# Altium PCB SystemV1.PcbDoc (part 3 of 3)
Units mm, origin at the board's own origin, x right, y up, seen from the top; angles counter-clockwise.
Board outline 488.95 x 74.14 mm, 4 copper layers (Top Layer, GND, VCC, Bottom Layer), stack 1.586 mm thick; 264 components, 188 nets, 862 pads, 658 vias.
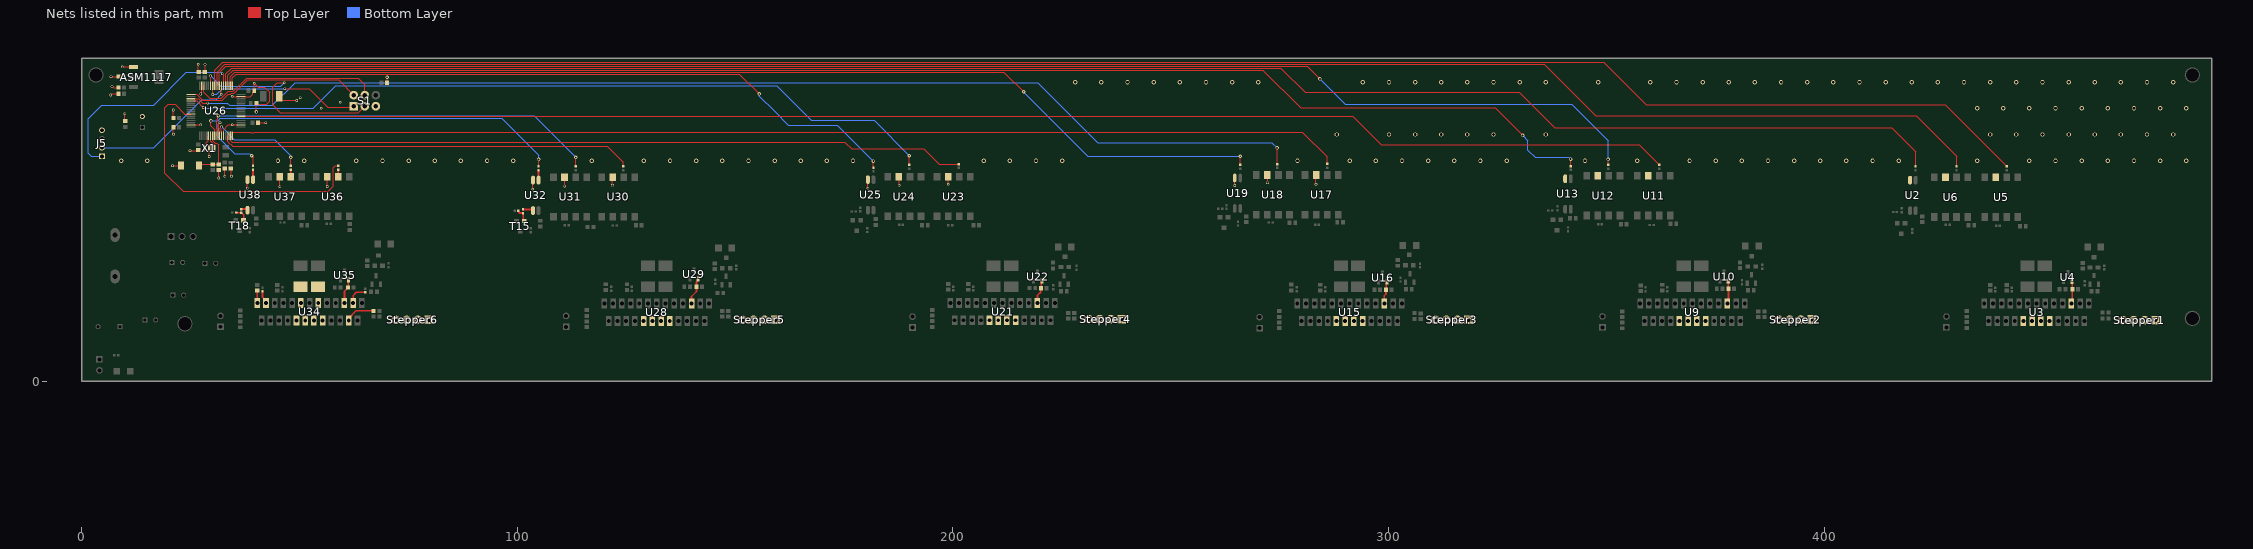
[diagram p5: the nets of this part, all layers, seen from the top]

## Via types
v1: diameter 1, hole 0.6, Top Layer to Bottom Layer, tented both sides, 342 vias
v2: diameter 0.8, hole 0.4, Top Layer to Bottom Layer, tented both sides, 207 vias
v3: diameter 0.6, hole 0.4, Top Layer to Bottom Layer, tented both sides, 109 vias

## Nets (pads, with @x,y where several pads share a name; then routed paths per layer and width w, separated by ;. In a path a pad name is that pad's centre, name@x,y a point inside that pad or via, vN(x,y) a via of type N, cw(c..) or ccw(c..) an arc to the next point about the centre after c; other vN are vias at no path point) (continued)
NetR102_1: R102.1 U32.1 | length 2.3
  Top Layer w0.381: U32.1@104.902,46.172 R102.1@104.902,48.462
NetR103_1: R103.1 R104.1 T15.B | length 3.4
  Top Layer w0.381: R104.1@100.255,39.116 100.268,39.116 100.347,39.036 100.347,38.755 100.505,38.598 101.305,38.598 R103.1@101.346,38.556 101.426,38.477 101.426,36.945 T15.B@101.611,36.76
NetR103_2: R103.2 U32.3 | length 2.4
  Top Layer w0.381: R103.2@101.346,39.422 103.392,39.422 103.632,39.182 U32.3@103.632,39.172
NetR106_2: R106.2 U34.3 | length 4.8
  Top Layer w0.381: U34.3@62.345,17.97 62.337,17.978 62.337,19.69 63.043,20.396 R106.2@65.1,20.396
NetR111_1: R111.1 U34.25 | length 2.9
  Top Layer w0.381: U34.25@40.345,17.97 40.361,17.986 R111.1@40.361,20.824
NetR112_1: R112.1 U34.4 | length 6.9
  Top Layer w0.381: U34.4@61.345,13.97 61.345,14.478 63.011,16.144 R112.1@67.005,16.144
NetR114_1: R114.1 U34.23 | length 3
  Top Layer w0.381: R114.1@41.529,20.635 41.529,19.294 42.345,18.478 U34.23@42.345,17.97
NetR115_2: R115.2 U34.11
NetR116_2: R116.2 U34.15
NetR118_1: R118.1 U36.2 | length 1.6
  Top Layer w0.381: U36.2@58.928,46.938 R118.1@58.928,48.564
NetR120_1: R120.1 U37.2 | length 1.6
  Top Layer w0.381: U37.2@48.006,46.938 R120.1@48.006,48.564
NetR122_1: R122.1 U38.1 | length 2.3
  Top Layer w0.381: U38.1@39.37,46.274 R122.1@39.37,48.564
NetR123_1: R123.1 R124.1 T18.B | length 3.2
  Top Layer w0.381: R124.1@35.485,38.71 35.511,38.684 36.677,38.684 R123.1@36.703,38.658 36.703,38.645 37.211,38.137 T18.B@37.211,36.932
NetR123_2: R123.2 U38.3 | length 1.5
  Top Layer w0.381: R123.2@36.703,39.523 37.86,39.523 38.1,39.284 U38.3@38.1,39.274
OSC_IN: U26.5 X1.1 | length 2.5
  Top Layer w0.25: 28.123,54.234 29.111,55.222 U26.5@29.111,56.328
OSC_OU: U26.6 X1.3 | length 3.3
  Top Layer w0.25: U26.6@29.611,56.328 29.611,55.073 30.412,54.272 30.412,53.567 X1.3@30.537,53.442
RST: C32.2 R83.2 SW5.2 U26.7 | length 12
  Top Layer w0.25: SW5.2@26.967,49.505 27.236,49.774 R83.2@30.099,49.774 31.481,49.774 C32.2@31.496,49.759 31.496,54.254 31.081,54.67 30.655,54.67 30.121,55.204 30.121,56.318 U26.7@30.111,56.328
RX0: S1.3 U26.43 | length 49.6
  Top Layer w0.25: U26.43@29.616,68.54 29.614,68.542 29.614,70.076 v3(29.616,70.079) ; v3(46.558,68.478) 46.533,68.504 44.882,68.504 43.84,67.462 43.84,63.398 45.65,61.588 63.493,61.588 S1.3@65.024,63.119
  Bottom Layer w0.25: v3(29.616,70.079) 32.002,67.693 45.773,67.693 v3(46.558,68.478)
Stepper1_A1: Stepper1.1 U3.16
Stepper1_A2: Stepper1.2 U3.14
Stepper1_B1: Stepper1.3 U3.12
Stepper1_B2: Stepper1.4 U3.10
Stepper2_A1: Stepper2.1 U9.16
Stepper2_A2: Stepper2.2 U9.14
Stepper2_B1: Stepper2.3 U9.12
Stepper2_B2: Stepper2.4 U9.10
Stepper3_A1: Stepper3.1 U15.16
Stepper3_A2: Stepper3.2 U15.14
Stepper3_B1: Stepper3.3 U15.12
Stepper3_B2: Stepper3.4 U15.10
Stepper4_A1: Stepper4.1 U21.16
Stepper4_A2: Stepper4.2 U21.14
Stepper4_B1: Stepper4.3 U21.12
Stepper4_B2: Stepper4.4 U21.10
Stepper5_A1: Stepper5.1 U28.16
Stepper5_A2: Stepper5.2 U28.14
Stepper5_B1: Stepper5.3 U28.12
Stepper5_B2: Stepper5.4 U28.10
Stepper6_A1: Stepper6.1 U34.16
Stepper6_A2: Stepper6.2 U34.14
Stepper6_B1: Stepper6.3 U34.12
Stepper6_B2: Stepper6.4 U34.10
STM_CLK_1: R18.2 U26.41 | length 425.5
  Top Layer w0.25: U26.41@30.611,67.827 30.621,67.837 30.621,68.722 30.632,68.734 30.632,71.399 32.454,73.221 349.333,73.221 359.131,63.424 427.788,63.424 441.751,49.46 441.764,49.46 441.909,49.315 R18.2@441.909,49.302
STM_CLK_2: R35.2 U26.22 | length 329.8
  Top Layer w0.25: U26.22@36.967,60.808 36.978,60.818 291.785,60.818 298.323,54.28 357.481,54.28 361.97,49.79 361.983,49.79 362.128,49.645 R35.2@362.128,49.633
STM_CLK_3: R56.2 U26.16 | length 255.2
  Top Layer w0.25: 34.804,57.175 38.893,57.175 38.983,57.085 39.503,57.085 39.593,57.175 280.213,57.175 285.877,51.511 285.877,49.888 R56.2@285.902,49.862
STM_CLK_4: R76.2 U26.15 | length 170.5
  Top Layer w0.25: U26.15@34.111,56.328 34.121,56.318 34.121,55.292 34.599,54.813 175.235,54.813 176.733,53.315 193.349,53.315 196.853,49.81 R76.2@201.32,49.81
STM_CLK_5: R98.2 U26.14 | length 95.1
  Top Layer w0.25: U26.14@33.611,56.328 33.611,54.933 34.671,53.873 120.701,53.873 124.333,50.241 R98.2@124.333,49.328 R98.2@124.257,49.404
STM_CLK_6: R118.2 U26.58 | length 68.7
  Top Layer w0.25: U26.58@25.111,61.328 23.661,61.328 21.463,63.525 19.888,63.525 19.152,62.789 19.152,47.777 23.343,43.586 56.617,43.586 57.734,44.704 57.734,49.047 58.191,49.505 58.853,49.505 R118.2@58.928,49.429
STM_DIR_1: R20.2 U26.40 | length 414.2
  Top Layer w0.25: U26.40@31.111,67.245 U26.40@31.115,67.249 ; U26.40@31.111,67.827 31.111,70.964 32.915,72.768 335.689,72.768 347.548,60.909 421.107,60.909 430.352,51.664 R20.2@430.352,49.302
STM_DIR_2: R37.2 U26.39 | length 335
  Top Layer w0.25: U26.39@31.611,67.827 31.611,70.778 33.148,72.315 281.304,72.315 v2(284.251,69.367) ; v2(350.368,50.902) 350.406,50.863 350.406,49.671 R37.2@350.444,49.633
  Bottom Layer w0.25: v2(284.251,69.367) 290.068,63.551 342.011,63.551 350.368,55.194 v2(350.368,50.902)
STM_DIR_3: R58.2 U26.51 | length 261.4
  Top Layer w0.25: U26.51@25.747,64.828 26.86,64.828 27.858,63.83 v3(28.981,63.83) ; v2(274.396,53.543) 274.472,53.467 R58.2@274.472,49.81
  Bottom Layer w0.25: v3(28.981,63.83) 33.477,63.83 34.017,63.291 43.809,63.291 49.022,68.504 219.507,68.504 233.299,54.712 273.228,54.712 v2(274.396,53.543)
STM_DIR_4: R78.2 U26.52 | length 175.7
  Top Layer w0.25: U26.52@25.817,64.338 25.837,64.318 26.436,64.318 v3(27.94,62.814) ; v2(189.992,51.765) 190.005,51.752 190.005,49.696 R78.2@190.017,49.683
  Bottom Layer w0.25: v3(27.94,62.814) 28.035,62.814 28.201,62.648 53.224,62.648 58.344,67.767 159.588,67.767 167.513,59.842 181.915,59.842 v2(189.992,51.765)
STM_DIR_5: R100.2 U26.9 | length 92.8
  Top Layer w0.25: U26.9@31.111,56.328 31.111,57.864 30.992,57.983 30.992,59.948 31.315,60.27 31.315,60.804 v2(31.42,60.909) ; R100.2@113.411,49.328 v2(113.411,51.359)
  Bottom Layer w0.25: v2(31.42,60.909) 103.886,60.909 113.411,51.384 v2(113.411,51.359)
STM_DIR_6: R120.2 U26.11 | length 22.2
  Top Layer w0.25: U26.11@32.121,57.095 v3@32.121,58.355 ; R120.2@48.006,49.429 48.031,49.455 v2(48.031,51.359)
  Bottom Layer w0.25: v3(32.135,58.369) 35.077,55.427 44.318,55.427 47.926,51.82 47.926,51.464 v2(48.031,51.359)
STM_ENABLE_1: R7.2 U26.36 | length 402.5
  Top Layer w0.25: U26.36@33.101,67.203 U26.36@33.122,67.223 ; U26.36@33.111,67.827 33.111,70.525 34.447,71.862 275.28,71.862 280.822,66.319 330.022,66.319 338.125,58.217 415.442,58.217 420.954,52.705 R7.2@420.954,49.302
STM_ENABLE_2: R39.2 U26.35 | length 322.4
  Top Layer w0.25: U26.35@33.611,67.827 33.611,70.187 34.832,71.408 271.136,71.408 279.832,62.713 324.46,62.713 v2(330.759,56.413) ; v2(341.782,50.978) 341.795,50.965 341.795,49.391 R39.2@341.808,49.379
  Bottom Layer w0.25: v2(330.759,56.413) 331.953,55.22 331.953,53.061 333.654,51.359 341.401,51.359 v2(341.782,50.978)
STM_ENABLE_3: R60.2 U26.34 | length 244.4
  Top Layer w0.25: U26.34@34.111,67.827 34.111,69.9 35.167,70.955 211.721,70.955 v2(216.256,66.421) ; R60.2@265.963,49.683 v2(265.963,51.613)
  Bottom Layer w0.25: v2(216.256,66.421) 216.256,66.272 230.915,51.613 v2(265.963,51.613)
STM_ENABLE_4: R80.2 U26.33 | length 159.3
  Top Layer w0.25: U26.33@34.611,67.827 34.611,69.612 35.501,70.502 150.986,70.502 v2(155.55,65.938) ; R80.2@181.762,49.048 v2(181.762,50.521)
  Bottom Layer w0.25: v2(155.55,65.938) 155.606,65.882 155.606,65.399 158.942,62.063 162.23,58.776 173.507,58.776 v2(181.762,50.521)
STM_ENABLE_5: R102.2 U26.8 | length 85.3
  Top Layer w0.25: v2(29.718,59.741) 29.718,58.616 30.611,57.723 U26.8@30.611,56.328 ; R102.2@104.902,49.328 v2(104.902,50.902)
  Bottom Layer w0.25: v2(29.718,59.741) 29.769,59.792 31.337,59.792 31.871,60.325 96.497,60.325 104.902,51.919 v2(104.902,50.902)
STM_ENABLE_6: R122.2 U26.10 | length 18
  Top Layer w0.25: U26.10@31.589,56.901 31.611,56.923 31.611,58.005 31.445,58.171 31.445,58.95 31.775,59.28 v3(31.775,59.341) ; v2(39.065,51.74) 39.37,51.435 R122.2@39.37,49.429
  Bottom Layer w0.25: v3(31.775,59.341) 31.369,58.935 31.369,56.032 35.154,52.248 38.557,52.248 v2@39.052,51.753
STM_RX_PIN: J5.2 U26.38 | length 33.7
  Top Layer w0.25: v3(32.08,65.837) 32.101,65.858 32.101,67.092 U26.38@32.106,67.096
  Bottom Layer w0.25: J5.2@4.699,53.601 16.593,53.601 27.635,64.643 30.886,64.643 v3(32.08,65.837)
STM_TX_PIN: J5.1 U26.37 | length 49.5
  Top Layer w0.25: v3(32.334,70.561) 32.334,70.466 32.611,70.19 U26.37@32.611,67.827
  Bottom Layer w0.25: J5.1@4.699,51.601 2.247,51.601 1.549,52.299 1.549,60.223 4.699,63.373 16.586,63.373 24.079,70.866 32.013,70.866 32.318,70.561 v3(32.334,70.561)
SWCLK: S1.2 U26.49 | length 41.3
  Top Layer w0.25: U26.49@25.111,65.828 26.501,65.828 27.838,64.491 32.283,64.491 33.706,65.913 34.265,65.913 34.398,66.046 35.089,66.046 38.181,69.139 59.004,69.139 S1.2@62.484,65.659
SWDIO: S1.4 U26.46 | length 44
  Top Layer w0.25: U26.46@28.111,67.827 28.111,66.275 29.443,64.944 32.096,64.944 33.651,66.499 34.809,66.499 37.902,69.592 63.504,69.592 65.024,68.072 S1.4@65.024,65.659
TX0: S1.1 U26.42 | length 36.3
  Top Layer w0.25: v3(30.124,65.816) U26.42@30.124,67.274 ; v3(46.66,67.158) 52.248,67.158 56.566,62.84 62.205,62.84 S1.1@62.484,63.119
  Bottom Layer w0.25: v3(30.124,65.816) 31.063,65.816 32.405,67.158 v3(46.66,67.158)
uCGND: ASM1117.GND C17.1 C18.1 C19.1 C20.2 C21.1 C22.1 C23.1 C24.1 C25.1 C26.1 C27.1 C28.1 C29.1 C30.1 C31.2 C32.1 J5.4 R48.1 R84.1 S1.5 SW5.1 U2.2 U5.3 U6.3 U11.3 U12.3 U13.2 U17.3 U18.3 U19.2 U23.3 U24.3 U25.2 U26.12 U26.18 U26.31 U26.47 U26.63 U30.3 U31.3 U32.2 U36.3 U37.3 U38.2 X1.2 | length 72.3
  Top Layer w0.25: v3(6.731,65.684) 6.826,65.684 7.131,65.989 C18.1@8.23,65.989 ; v3(6.771,69.926) C19.1@8.23,69.926 ; v3(7.01,67.64) 7.105,67.64 7.359,67.386 C17.1@8.23,67.386 ; v3(9.377,72.136) 10.835,72.136 ; C21.1@9.957,59.904 v3(9.957,61.362) ; v3(20.883,49.479) SW5.1@22.342,49.479 ; R84.1@21.031,60.793 v3(21.031,62.251) ; v3(21.107,56.672) C26.1@21.107,58.13 ; v3(24.897,52.883) C22.1@26.355,52.883 ; U26.63@25.918,58.826 v3(27.377,58.826) ; C25.1@26.822,71.283 v3(26.822,72.741) ; v3(27.33,65.913) 27.33,66.008 27.61,66.287 U26.47@27.61,67.35 ; C27.1@28.346,71.232 v3(28.346,72.69) ; v3(29.337,51.567) X1.2@29.337,53.025 ; v3(31.521,46.639) C32.1@31.521,48.097 ; U26.12@32.611,56.328 32.611,57.757 33.706,58.852 v3(34.569,58.852) 34.584,58.837 35.844,58.837 U26.18@35.854,58.826 ; v3(32.918,47.071) C29.1@32.918,48.529 ; v3(34.417,47.045) C28.1@34.417,48.504 ; v3(34.62,65.38) 34.663,65.337 U26.31@36.253,65.337 ; U26.31@36.611,65.328 38.785,65.328 39.314,65.857 39.314,66.325 C24.1@39.639,66.65 ; v3(38.075,44.277) U38.2@38.075,45.735 ; C24.1@39.675,66.914 v3(39.675,68.372) 40.543,67.504 41.981,67.504 43.205,66.28 43.205,64.313 42.494,63.602 R48.1@40.401,63.602 ; R48.1@40.147,63.856 40.147,61.809 v2(40.157,61.798) ; C23.1@40.854,59.36 v3(42.312,59.36) ; v3(45.542,44.658) U37.3@45.542,46.116 ; C31.2@45.913,64.44 v3(49.378,64.44) ; v3(56.413,44.683) U36.3@56.413,46.141 ; v2(70.129,69.774) 70.144,69.759 C30.1@70.144,68.478 ; v3(103.581,44.048) U32.2@103.581,45.506 ; v3(110.896,44.785) U31.3@110.896,46.243 ; v3(121.869,44.937) U30.3@121.869,46.395 ; v3(180.492,44.302) U25.2@180.492,45.76 ; v3(187.655,44.963) U24.3@187.655,46.421 ; v3(198.933,45.215) U23.3@198.933,46.673 ; v3(264.719,44.932) U19.2@264.719,46.39 ; v3(272.212,45.596) U18.3@272.212,47.054 ; v3(283.337,45.191) U17.3@283.337,46.649
  other v1: 9.084,50.64 15.084,50.64 45.084,50.64 51.084,50.64 63.084,50.64 69.084,50.64 75.084,50.64 81.084,50.64 87.084,50.64 93.084,50.64 99.084,50.64 117.084,50.64 129.084,50.64 135.084,50.64 141.084,50.64 147.084,50.64 153.084,50.64 159.084,50.64 165.084,50.64 171.084,50.64 177.084,50.64 207.084,50.64 213.084,50.64 219.084,50.64 225.084,50.64 279.084,50.64 291.084,50.64 297.084,50.64 303.084,50.64 309.084,50.64 315.084,50.64 321.084,50.64 327.084,50.64 345.084,50.64 357.084,50.64 369.084,50.64 375.084,50.64 381.084,50.64 387.084,50.64 393.084,50.64 399.084,50.64 405.084,50.64 411.084,50.64 417.084,50.64 435.084,50.64 447.084,50.64 453.084,50.64 459.084,50.64 465.084,50.64 471.084,50.64 477.084,50.64 483.084,50.64 288.084,56.64 300.084,56.64 306.084,56.64 312.084,56.64 318.084,56.64 324.084,56.64 336.084,56.64 438.084,56.64 444.084,56.64 450.084,56.64 456.084,56.64 462.084,56.64 468.084,56.64 474.084,56.64 480.084,56.64 435.084,62.64 441.084,62.64 447.084,62.64 453.084,62.64 459.084,62.64 465.084,62.64 471.084,62.64 477.084,62.64 483.084,62.64 228.084,68.64 234.084,68.64 240.084,68.64 246.084,68.64 252.084,68.64 258.084,68.64 264.084,68.64 270.084,68.64 294.084,68.64 300.084,68.64 306.084,68.64 312.084,68.64 318.084,68.64 324.084,68.64 330.084,68.64 336.084,68.64 348.084,68.64 360.084,68.64 366.084,68.64 372.084,68.64 378.084,68.64 384.084,68.64 390.084,68.64 396.084,68.64 402.084,68.64 408.084,68.64 414.084,68.64 420.084,68.64 426.084,68.64 432.084,68.64 438.084,68.64 444.084,68.64 450.084,68.64 456.084,68.64 462.084,68.64 468.084,68.64 474.084,68.64 480.084,68.64
  other v3: 55.042,62.662 59.411,64.033 50.216,65.1
Vref1: C10.2 U3.5 U4.2 | length 5.2
  Top Layer w0.381: U3.5@456.716,17.868 456.931,18.083 C10.2@456.931,21.107 456.893,21.146 456.893,22.863 U4.2@456.855,22.901
Vref2: C40.2 U9.5 U10.2 | length 5.3
  Top Layer w0.381: U9.5@377.748,17.843 378.013,18.108 C40.2@378.013,21.209 377.988,21.235 377.988,22.977 U10.2@377.962,23.003
Vref3: C51.2 U15.5 U16.2 | length 5.2
  Top Layer w0.381: U15.5@299.037,17.868 299.037,19.662 299.4,20.026 C51.2@299.4,21.006 299.502,21.107 299.502,22.698 U16.2@299.603,22.8
Vref4: C62.2 U21.5 U22.2 | length 5.4
  Top Layer w0.381: U21.5@219.404,17.995 219.404,19.709 220.142,20.447 220.142,21.326 C62.2@220.178,21.361 220.292,21.476 220.292,22.914 U22.2@220.406,23.028
Vref5: C78.2 U28.5 U29.2 | length 6.9
  Top Layer w0.381: U28.5@140.464,18.313 U28.5@140.02,17.868 140.02,19.446 141.158,20.584 C78.2@141.158,21.692 141.158,22.854 141.524,23.22 U29.2@141.524,23.495
Vref6: C90.2 U34.5 U35.2 | length 5.7
  Top Layer w0.381: U34.5@60.345,17.97 60.345,20.634 61.244,21.532 61.244,23.223 U35.2@61.312,23.292
pads on no net: U5.1 U5.4 U5.7 U6.1 U6.4 U6.7 U11.1 U11.4 U11.7 U12.1 U12.4 U12.7 U17.1 U17.4 U17.7 U18.1 U18.4 U18.7 U23.1 U23.4 U23.7 U24.1 U24.4 U24.7 U26.2 U26.3 U26.4 U26.17 U26.20 U26.21 U26.23 U26.24 U26.25 U26.26 U26.27 U26.29 U26.44 U26.45 U26.50 U26.53 U26.54 U26.55 U26.56 U26.57 U26.59 U26.61 U26.62 U30.1 U30.4 U30.7 U31.1 U31.4 U31.7 U36.1 U36.4 U36.7 U37.1 U37.4 U37.7

## Polygon pours and split planes (outlines as drawn)
uCGND on Bottom Layer "NONET_L-01_P-001" (solid, pour order 8): 0.508,73.609 488.442,73.609 488.442,43.256 0.508,43.256
GND on Bottom Layer "NONET_L-01_P-001" (solid, pour order 5): 0.533,41.123 0.533,40.615 488.442,40.615 488.442,0.762 0.508,0.762
uCGND on Top Layer "NONET_L-01_P-001" (solid, pour order 7): 0.508,73.609 488.442,73.609 488.442,43.256 0.508,43.256
GND on Top Layer "NONET_L-01_P-001" (solid, pour order 6): 0.533,41.123 0.533,40.615 488.442,40.615 488.442,0.762 0.508,0.762
+24V on VCC (split plane): 532 vertices, not listed, extent 0.51,0.51 488.44,41.387
+3.3V_uC on VCC (split plane): 488.44,43.144 488.343,43.191 488.219,43.234 488.09,43.259 487.959,43.268 364.303,43.268 364.257,43.272 364.202,43.272 364.183,43.276 364.137,43.28 364.092,43.284 20.157,43.284 20.15,43.286 20.051,43.296 19.95,43.296 19.85,43.286 19.792,43.268 19.79,43.268 0.51,43.268 0.51,73.632 488.44,73.632
+5V on VCC (split plane): 494 vertices, not listed, extent 25.271,12.8 464.314,41.263
+5V_uC on VCC (split plane): 14.886,66.802 14.895,66.737 14.92,66.676 14.96,66.624 15.012,66.584 15.073,66.558 15.138,66.55 17.807,66.55 17.807,55.015 3.808,55.015 3.808,56.466 8.534,56.466 8.6,56.475 8.66,56.5 8.713,56.54 8.753,56.592 8.778,56.653 8.787,56.718 8.787,58.727 15.951,58.727 16.016,58.735 16.077,58.76 16.13,58.8 16.17,58.853 16.195,58.914 16.203,58.979 16.203,64.795 16.195,64.861 16.17,64.921 16.13,64.974 16.077,65.014 16.016,65.039 15.951,65.048 7.44,65.048 7.44,68.201 14.886,68.201
+5V on VCC (split plane): 127.154,20.015 127.163,19.95 127.188,19.889 127.228,19.837 127.28,19.797 127.341,19.772 127.406,19.763 136.831,19.763 136.815,19.725 136.806,19.66 136.806,17.067 135.38,17.067 135.38,19.126 135.372,19.191 135.346,19.252 135.306,19.305 135.254,19.345 135.193,19.37 135.128,19.378 119.658,19.378 119.658,24.564 127.154,24.564
GND on GND (split plane): 488.44,43.19 488.346,43.222 488.217,43.247 488.086,43.256 364.664,43.256 364.533,43.247 364.456,43.232 364.453,43.233 364.415,43.245 364.357,43.262 364.257,43.272 364.202,43.272 364.183,43.276 364.137,43.28 364.092,43.284 20.157,43.284 20.15,43.286 20.051,43.296 19.95,43.296 19.85,43.286 19.792,43.268 19.755,43.257 19.751,43.256 19.674,43.271 19.543,43.28 0.52,43.28 0.51,43.279 0.51,73.632 488.44,73.632
GND on GND (split plane): 488.44,0.51 0.51,0.51 0.51,41.276 0.52,41.275 19.543,41.275 19.674,41.284 19.751,41.299 19.755,41.298 19.85,41.269 19.942,41.26 19.951,41.257 20.051,41.247 364.025,41.247 364.098,41.239 364.127,41.238 364.156,41.235 364.257,41.235 364.357,41.245 364.453,41.274 364.456,41.276 364.533,41.26 364.664,41.252 488.086,41.252 488.217,41.26 488.346,41.286 488.44,41.318

## Keep-outs
Keep-Out Layer:
  lines w0.6: 20.051,41.758 484.861,41.758 ccw(c484.861,42.266) 484.861,42.774 20.051,42.774 ; 20.051,41.769 cw(c20.051,42.277) 20.051,42.785 ; 0,0 488.95,0 488.95,74.143 0,74.143 0,0

## Other copper
Top Layer:
  rectangle net GND: 448.818,26.822 452.501,29.743
  rectangle net GND: 444.83,26.822 448.513,29.743
  rectangle net GND: 369.9,26.822 373.583,29.743
  rectangle net GND: 365.912,26.822 369.595,29.743
  rectangle net GND: 291.211,26.822 294.894,29.743
  rectangle net GND: 287.223,26.822 290.906,29.743
  rectangle net GND: 207.493,26.822 211.176,29.743
  rectangle net GND: 211.48,26.822 215.163,29.743
  rectangle net GND: 48.362,26.822 52.045,29.743
  rectangle net GND: 52.349,26.822 56.032,29.743
  rectangle net GND: 132.105,26.822 135.788,29.743
  rectangle net GND: 128.118,26.822 131.801,29.743
  region net +24V: 9.334,26.238 12.116,26.238 cw(c12.116,22.758) 15.596,22.758 15.596,12.294 cw(c12.319,12.294) 12.319,9.017 10.939,9.017 cw(c10.939,12.602) 7.355,12.565 6.35,24.867 cw(c8.521,24.076)
  region net +5V: 24.511,35.636 27.203,35.636 ccw(c42.775,35.636) 29.158,28.084 cw(c27.787,27.323) 27.786,25.756 27.483,25.756 cw(c27.483,28.727) 24.511,28.727
  region net +24V: 19.88,18.847 21.234,18.847 ccw(c21.234,19.406) 21.793,19.406 21.793,33.401 ccw(c20.549,33.401) 20.549,34.646 20.295,34.646 ccw(c20.295,33.223) 18.872,33.223 18.872,22.112 cw(c17.539,22.111) 18.258,20.989 ccw(c19.003,20.582) 18.155,20.591 ccw(c19.88,20.573)
  region net Stepper1_A1: 474.984,15.164 477.22,15.164 477.22,6.706 cw(c474.248,6.706) 474.248,3.734 447.502,3.734 cw(c447.502,6.223) 445.012,6.223 445.012,15.392 446.359,15.392 446.359,6.248 ccw(c447.273,6.248) 447.273,5.334 473.638,5.334 ccw(c473.638,6.68) 474.984,6.68
  region net Stepper1_A2: 472.504,15.189 474.527,15.189 474.527,8.433 cw(c471.733,8.433) 471.733,5.639 449.153,5.639 cw(c449.153,7.874) 446.917,7.874 446.917,15.367 448.365,15.367 448.365,7.823 ccw(c448.899,7.823) 448.899,7.29 471.534,7.29 ccw(c471.534,8.324) 472.568,8.333
  region net Stepper1_B1: 469.955,15.24 472.063,15.24 472.063,10.109 cw(c469.549,10.109) 469.549,7.595 450.829,7.595 cw(c450.829,9.449) 448.975,9.449 448.975,15.392 450.473,15.392 450.473,9.728 ccw(c451.108,9.728) 451.108,9.093 469.168,9.093 ccw(c469.168,9.881) 469.955,9.881
  region net Stepper1_B2: 467.314,15.24 469.523,15.24 469.523,12.395 cw(c466.704,12.395) 466.704,9.576 452.759,9.576 cw(c452.759,11.379) 450.956,11.379 450.956,15.392 452.48,15.392 452.48,12.04 ccw(c453.14,12.04) 453.14,11.379 466.298,11.379 ccw(c466.298,12.395) 467.314,12.395
  region net Stepper2_A1: 396.016,15.138 398.251,15.138 398.251,6.68 cw(c395.279,6.68) 395.279,3.708 368.533,3.708 cw(c368.533,6.198) 366.044,6.198 366.044,15.367 367.39,15.367 367.39,6.223 ccw(c368.304,6.223) 368.304,5.309 394.67,5.309 ccw(c394.67,6.655) 396.016,6.655
  region net Stepper2_A2: 393.536,15.164 395.559,15.164 395.559,8.407 cw(c392.765,8.407) 392.765,5.613 370.184,5.613 cw(c370.184,7.849) 367.949,7.849 367.949,15.342 369.397,15.342 369.397,7.798 ccw(c369.93,7.798) 369.93,7.264 392.565,7.264 ccw(c392.565,8.298) 393.599,8.308
  region net Stepper2_B1: 390.987,15.215 393.095,15.215 393.095,10.084 cw(c390.58,10.084) 390.58,7.569 371.86,7.569 cw(c371.86,9.423) 370.006,9.423 370.006,15.367 371.505,15.367 371.505,9.703 ccw(c372.14,9.703) 372.14,9.068 390.199,9.068 ccw(c390.199,9.855) 390.987,9.855
  region net Stepper2_B2: 388.345,15.215 390.555,15.215 390.555,12.37 cw(c387.735,12.37) 387.735,9.55 373.791,9.55 cw(c373.791,11.354) 371.987,11.354 371.987,15.367 373.511,15.367 373.511,12.014 ccw(c374.172,12.014) 374.172,11.354 387.329,11.354 ccw(c387.329,12.37) 388.345,12.37
  region net Stepper4_A1: 237.672,15.291 239.907,15.291 239.907,6.833 cw(c236.936,6.833) 236.936,3.861 210.189,3.861 cw(c210.189,6.35) 207.7,6.35 207.7,15.519 209.046,15.519 209.046,6.375 ccw(c209.961,6.375) 209.961,5.461 236.326,5.461 ccw(c236.326,6.807) 237.672,6.807
  region net Stepper4_A2: 235.192,15.316 237.215,15.316 237.215,8.56 cw(c234.421,8.56) 234.421,5.766 211.84,5.766 cw(c211.84,8.001) 209.605,8.001 209.605,15.494 211.053,15.494 211.053,7.95 ccw(c211.586,7.95) 211.586,7.417 234.222,7.417 ccw(c234.222,8.451) 235.256,8.46
  region net Stepper4_B1: 232.643,15.367 234.751,15.367 234.751,10.236 cw(c232.237,10.236) 232.237,7.722 213.517,7.722 cw(c213.517,9.576) 211.663,9.576 211.663,15.519 213.161,15.519 213.161,9.855 ccw(c213.796,9.855) 213.796,9.22 231.856,9.22 ccw(c231.856,10.008) 232.643,10.008
  region net Stepper4_B2: 230.001,15.367 232.211,15.367 232.211,12.522 cw(c229.392,12.522) 229.392,9.703 215.447,9.703 cw(c215.447,11.506) 213.644,11.506 213.644,15.519 215.168,15.519 215.168,12.167 ccw(c215.828,12.167) 215.828,11.506 228.985,11.506 ccw(c228.985,12.522) 230.001,12.522
  region net Stepper3_B2: 309.634,15.24 311.844,15.24 311.844,12.395 cw(c309.025,12.395) 309.025,9.576 295.08,9.576 cw(c295.08,11.379) 293.277,11.379 293.277,15.392 294.801,15.392 294.801,12.04 ccw(c295.461,12.04) 295.461,11.379 308.618,11.379 ccw(c308.618,12.395) 309.634,12.395
  region net Stepper3_B1: 312.276,15.24 314.384,15.24 314.384,10.109 cw(c311.869,10.109) 311.869,7.595 293.15,7.595 cw(c293.15,9.449) 291.295,9.449 291.295,15.392 292.794,15.392 292.794,9.728 ccw(c293.429,9.728) 293.429,9.093 311.488,9.093 ccw(c311.488,9.881) 312.276,9.881
  region net Stepper3_A2: 314.825,15.189 316.848,15.189 316.848,8.433 cw(c314.054,8.433) 314.054,5.639 291.473,5.639 cw(c291.473,7.874) 289.238,7.874 289.238,15.367 290.686,15.367 290.686,7.823 ccw(c291.219,7.823) 291.219,7.29 313.855,7.29 ccw(c313.855,8.324) 314.888,8.333
  region net Stepper3_A1: 317.305,15.164 319.54,15.164 319.54,6.706 cw(c316.568,6.706) 316.568,3.734 289.822,3.734 cw(c289.822,6.223) 287.333,6.223 287.333,15.392 288.679,15.392 288.679,6.248 ccw(c289.594,6.248) 289.594,5.334 315.959,5.334 ccw(c315.959,6.68) 317.305,6.68
  region net Stepper5_B2: 150.617,15.24 152.827,15.24 152.827,12.395 cw(c150.007,12.395) 150.007,9.576 136.063,9.576 cw(c136.063,11.379) 134.259,11.379 134.259,15.392 135.783,15.392 135.783,12.04 ccw(c136.444,12.04) 136.444,11.379 149.601,11.379 ccw(c149.601,12.395) 150.617,12.395
  region net Stepper5_B1: 153.259,15.24 155.367,15.24 155.367,10.109 cw(c152.852,10.109) 152.852,7.595 134.132,7.595 cw(c134.132,9.449) 132.278,9.449 132.278,15.392 133.777,15.392 133.777,9.728 ccw(c134.412,9.728) 134.412,9.093 152.471,9.093 ccw(c152.471,9.881) 153.259,9.881
  region net Stepper5_A2: 155.808,15.189 157.831,15.189 157.831,8.433 cw(c155.037,8.433) 155.037,5.639 132.456,5.639 cw(c132.456,7.874) 130.221,7.874 130.221,15.367 131.669,15.367 131.669,7.823 ccw(c132.202,7.823) 132.202,7.29 154.837,7.29 ccw(c154.837,8.324) 155.871,8.333
  region net Stepper5_A1: 158.288,15.164 160.523,15.164 160.523,6.706 cw(c157.551,6.706) 157.551,3.734 130.805,3.734 cw(c130.805,6.223) 128.316,6.223 128.316,15.392 129.662,15.392 129.662,6.248 ccw(c130.576,6.248) 130.576,5.334 156.942,5.334 ccw(c156.942,6.68) 158.288,6.68
  region net Stepper6_A1: 78.613,15.265 80.848,15.265 80.848,6.807 cw(c77.876,6.807) 77.876,3.835 51.13,3.835 cw(c51.13,6.325) 48.641,6.325 48.641,15.494 49.987,15.494 49.987,6.35 ccw(c50.902,6.35) 50.902,5.436 77.267,5.436 ccw(c77.267,6.782) 78.613,6.782
  region net Stepper6_A2: 76.133,15.291 78.156,15.291 78.156,8.534 cw(c75.362,8.534) 75.362,5.74 52.781,5.74 cw(c52.781,7.976) 50.546,7.976 50.546,15.469 51.994,15.469 51.994,7.925 ccw(c52.527,7.925) 52.527,7.391 75.163,7.391 ccw(c75.163,8.425) 76.196,8.435
  region net Stepper6_B1: 73.584,15.342 75.692,15.342 75.692,10.211 cw(c73.177,10.211) 73.177,7.696 54.458,7.696 cw(c54.458,9.55) 52.603,9.55 52.603,15.494 54.102,15.494 54.102,9.83 ccw(c54.737,9.83) 54.737,9.195 72.796,9.195 ccw(c72.796,9.982) 73.584,9.982
  region net Stepper6_B2: 70.942,15.342 73.152,15.342 73.152,12.497 cw(c70.333,12.497) 70.333,9.677 56.388,9.677 cw(c56.388,11.481) 54.585,11.481 54.585,15.494 56.109,15.494 56.109,12.141 ccw(c56.769,12.141) 56.769,11.481 69.926,11.481 ccw(c69.926,12.497) 70.942,12.497
  region net +24V: 427.055,13.335 431.703,13.335 431.703,12.725 433.913,12.725 433.913,11.963 440.974,11.963 440.974,15.24 442.549,15.24 442.549,11.1 427.08,11.1
  region net NetR15_2: 448.809,22.885 448.809,22.911 452.492,22.911 452.492,19.787 451.4,19.787 451.4,16.535 449.8,16.535 449.8,19.888 448.784,19.888
  region net NetR16_2: 444.809,22.885 444.809,22.911 448.492,22.911 448.492,19.787 447.4,19.787 447.4,16.535 445.8,16.535 445.8,19.888 444.784,19.888
  region net +24V: 348.086,13.31 352.734,13.31 352.734,12.7 354.944,12.7 354.944,11.938 362.005,11.938 362.005,15.215 363.58,15.215 363.58,11.074 348.111,11.074
  region net NetR32_2: 369.841,22.86 369.841,22.885 373.524,22.885 373.524,19.761 372.431,19.761 372.431,16.51 370.831,16.51 370.831,19.863 369.815,19.863
  region net NetR33_2: 365.841,22.86 365.841,22.885 369.524,22.885 369.524,19.761 368.431,19.761 368.431,16.51 366.831,16.51 366.831,19.863 365.815,19.863
  region net NetR73_2: 211.497,23.012 211.497,23.038 215.18,23.038 215.18,19.914 214.088,19.914 214.088,16.662 212.488,16.662 212.488,20.015 211.472,20.015
  region net NetR74_2: 207.497,23.012 207.497,23.038 211.18,23.038 211.18,19.914 210.088,19.914 210.088,16.662 208.488,16.662 208.488,20.015 207.472,20.015
  region net +24V: 189.742,13.462 194.391,13.462 194.391,12.852 196.6,12.852 196.6,12.09 203.662,12.09 203.662,15.367 205.236,15.367 205.236,11.227 189.768,11.227
  region net NetR54_2: 287.13,22.885 287.13,22.911 290.813,22.911 290.813,19.787 289.721,19.787 289.721,16.535 288.12,16.535 288.12,19.888 287.104,19.888
  region net NetR53_2: 291.13,22.885 291.13,22.911 294.813,22.911 294.813,19.787 293.721,19.787 293.721,16.535 292.12,16.535 292.12,19.888 291.104,19.888
  region net +24V: 269.375,13.335 274.023,13.335 274.023,12.725 276.233,12.725 276.233,11.963 283.294,11.963 283.294,15.24 284.869,15.24 284.869,11.1 269.401,11.1
  region net +24V: 30.683,13.437 35.331,13.437 35.331,12.827 37.541,12.827 37.541,12.065 44.602,12.065 44.602,15.342 46.177,15.342 46.177,11.201 30.709,11.201
  region net +24V: 110.358,13.335 115.006,13.335 115.006,12.725 117.216,12.725 117.216,11.963 124.277,11.963 124.277,15.24 125.852,15.24 125.852,11.1 110.383,11.1
  region net NetR96_2: 128.113,22.885 128.113,22.911 131.796,22.911 131.796,19.787 130.703,19.787 130.703,16.535 129.103,16.535 129.103,19.888 128.087,19.888
  region net NetR95_2: 132.113,22.885 132.113,22.911 135.796,22.911 135.796,19.787 134.703,19.787 134.703,16.535 133.103,16.535 133.103,19.888 132.087,19.888
  region net NetR115_2: 52.438,22.987 52.438,23.012 56.121,23.012 56.121,19.888 55.029,19.888 55.029,16.637 53.428,16.637 53.428,19.99 52.412,19.99
  region net NetR116_2: 48.438,22.987 48.438,23.012 52.121,23.012 52.121,19.888 51.029,19.888 51.029,16.637 49.428,16.637 49.428,19.99 48.412,19.99
  region net +5V_uC: 9.347,58.826 8.585,58.826 8.585,56.591 3.81,56.591 3.81,54.889 9.423,54.889 9.423,54.686
  region net +5V_uC: 9.347,58.826 9.347,58.852 14.884,58.852 14.884,57.277 9.373,57.277
  region net +3.3V_uC: 16.459,72.492 16.459,67.462 19.685,67.462 19.685,72.441
  region net +3.3V_uC: 9.296,70.891 20.396,70.891 20.396,69.088 9.271,69.088
  region net +5V_uC: 10.719,66.129 13.056,66.129 13.056,65.227 10.719,65.227
  region net +5V_uC: 13.106,68.097 13.106,68.174 9.271,68.174 9.271,65.227 10.719,65.227 10.719,67.031 13.132,67.031
Bottom Layer:
  region net +24V: 9.334,26.238 12.116,26.238 cw(c12.116,22.758) 15.596,22.758 15.596,12.294 cw(c12.319,12.294) 12.319,9.017 10.939,9.017 cw(c10.939,12.602) 7.355,12.565 7.236,24.118 cw(c9.334,24.139)
GND (plane layer: these items are gaps in the copper):
  lines w2: 0.52,42.277 19.543,42.277 ; 364.664,42.254 488.086,42.254
VCC (plane layer: these items are gaps in the copper):
  rectangle: 19.583,32.207 21.488,34.087
  rectangle: 13.437,13.106 15.519,15.138
  rectangle: 7.849,11.608 9.83,13.614
  region: 24.689,34.239 24.689,32.207 26.568,32.207 26.568,34.239
  region: 6.375,25.971 8.915,25.971 8.915,22.288 6.452,22.288
  region: 4.089,56.21 5.232,56.21 5.232,55.169 4.089,55.169
  lines w0.2: 132.283,41.199 177.013,41.199
  lines w0.5: 27.965,42.037 27.965,31.394 25.019,31.394 25.019,24.714 29.489,24.714 29.489,34.417 30.861,34.417 57.15,34.417 57.15,20.041 46.939,20.041 46.939,24.409 39.7,24.409 39.7,19.38 55.423,19.38 55.423,16.815 57.353,16.815 57.353,19.228 66.37,19.228 66.37,13.106 68.047,13.106 68.047,24.613 58.623,24.613 58.623,32.69 63.906,32.69 63.906,39.091 97.663,39.091 97.663,34.722 97.663,32.995 98.247,32.995 136.855,32.995 136.855,20.015 127.406,20.015 127.406,24.816 119.405,24.816 119.405,19.126 135.128,19.126 135.128,16.815 137.058,16.815 137.058,19.66 146.431,19.66 146.431,13.233 147.955,13.233 147.955,24.714 138.328,24.714 138.328,34.696 130.327,34.696 130.327,39.167 137.541,39.167 174.955,39.167 174.955,34.519 177.114,34.519 215.798,34.519 215.798,20.117 205.689,20.117 205.689,24.232 197.891,24.232 197.891,19.431 214.478,19.431 214.478,16.916 216.408,16.916 216.408,19.355 225.781,19.355 225.781,12.548 227.178,12.548 227.178,24.74 217.678,24.74 217.678,36.119 208.915,36.119 207.035,36.119 207.035,39.878 ; 207.086,39.878 209.017,39.878 258.648,39.878 258.648,33.909 ; 258.75,33.909 295.91,33.909 295.91,20.015 286.487,20.015 286.487,24.282 276.53,24.282 276.53,19.507 294.005,19.507 294.005,16.789 296.088,16.789 296.088,19.152 305.079,19.152 305.079,12.903 306.756,12.903 306.756,25.171 299.314,25.171 299.314,35.509 290.551,35.509 290.551,39.548 335.28,39.548 335.28,33.782 335.382,33.782 374.472,33.782 374.472,20.066 365.023,20.066 365.023,22.835 364.973,22.835 363.906,23.901 357.022,23.901 357.022,19.38 372.745,19.38 372.745,16.18 374.472,16.18 374.472,19.025 384.048,19.025 384.048,13.183 385.597,13.183 385.597,25.044 376.479,25.044 376.479,35.382 367.182,35.382 367.182,39.599 385.597,39.599 415.341,39.599 415.341,36.144 415.366,36.144 415.366,19.101 451.815,19.101 451.815,16.637 453.593,16.637 453.593,19.914 453.669,19.914 462.966,19.914 462.966,12.725 464.566,12.725 464.566,22.53 460.375,22.53 460.375,24.409 452.857,24.409 452.857,19.837 444.144,19.837 444.144,24.562 437.032,24.562 437.032,20.193 418.033,20.193 418.033,24.409 418.033,34.341 421.183,34.341 428.142,34.341 447.523,34.341 447.523,41.834 ; 3.556,54.762 3.556,56.718 8.534,56.718 8.534,58.979 15.951,58.979 15.951,64.795 7.188,64.795 7.188,68.453 15.138,68.453 15.138,66.802 18.059,66.802 18.059,54.762 3.556,54.762
  lines w2: 0.508,42.266 19.812,42.266 ; 364.109,42.266 487.959,42.266

## Silkscreen, mask and mechanical layers (free items; w line width, h text height)
Top Overlay:
  drawing of 30 lines, arcs and shapes, not listed
  text "SWCLK" at 63.074,67.513 h2 r90
  text "VCC" at 67.976,67.513 h2 r90
  text "SWDIO" at 65.512,67.437 h2 r90
  text "Auto Batch Doser" at 159.283,61.265 h10
  text "G" at 5.207,60.173 h2 r90
  text "GND" at 67.366,58.014 h2 r90
  text "TX_PA9" at 63.161,56.178 h2 r90
  text "V2.1" at 180.365,55.738 h9
  text "RX_PA10" at 65.735,55.499 h2 r90
  text "M5STACK     /  UART" at 10.16,49.759 h2 r90
  text "G" at 6.198,39.878 h5
  text "-" at 302.261,33.223 h2 r90
  text "Falut" at 67.589,33.122 h2
  text "-" at 67.361,33.071 h2 r90
  text "-" at 381.153,33.02 h2 r90
  text "-" at 459.741,32.817 h2 r90
  text "Falut" at 302.514,32.537 h2
  text "Falut" at 381.406,32.334 h2
  text "Falut" at 223.469,32.309 h2
  text "-" at 145.441,32.131 h2 r90
  text "-" at 223.063,32.131 h2 r90
  text "Falut" at 459.994,32.131 h2
  text "Falut" at 145.847,32.106 h2
  text "+24V" at 17.889,20.955 h3 r90
  text "Stepper 4" at 231.877,16.993 h2
  text "Stepper 2" at 389.89,16.871 h2
  text "Stepper 1" at 468.605,16.84 h2
  text "Stepper 5" at 153.111,16.815 h2
  text "Stepper 3" at 311.506,16.815 h2
  text "Stepper 6" at 72.923,16.764 h2
  text "+" at 4.732,7.325 h2 r90
  text "Fan" at 0.981,6.655 h2
  text "-" at 12.624,3.912 h2 r90
  text "Power" at 7.036,3.632 h2